# EAGLE board line_follower (EAGLE 9.6.2)
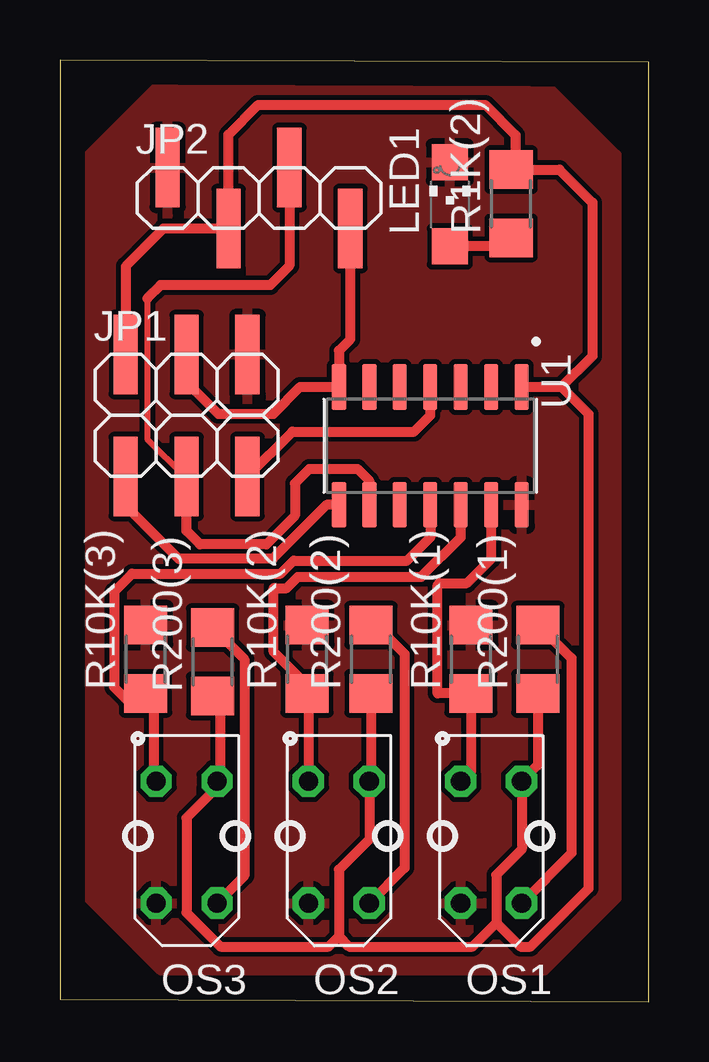
[diagram p0: board, top side]

Size 24.55 x 39.24 mm. Coordinates in mm from the lower left corner, seen from the top.
Outline: 0,0.1 24.55,0 24.55,39.14 0,39.24 0,0.1
Copper layers (1*16): Top 0.035mm / dielectric 1.5mm / Bottom 0.035mm
Design rules "default *": minimum track width 6mil, minimum drill 0.35mm, track to track 8mil, track to pad 8mil, pad to pad 8mil, via to via 8mil, smd to smd 8mil, copper to edge 40mil, drill to drill 6mil, minimum pad ring 10mil, minimum via ring 8mil, stop-mask expansion 4mil, vias tented up to drill 0mil, thermal gap 10mil

## Footprints (pad centres in the part's own frame; a part is rotated, then mirrored left to right if it is on the bottom)
2X03SMD = smd 1.016 x 3.302: 1 -1.27,-3.81; 2 -1.27,1.27; 3 1.27,-3.81; 4 1.27,1.27; 5 3.81,-3.81; 6 3.81,1.27
1X04SMD = smd 1.016 x 3.302: 1 -1.27,1.27; 2 1.27,-1.27; 3 3.81,1.27; 4 6.35,-1.27
CHIPLED_1206 = smd 1.5 x 1.5: A 0,-1.75; C 0,1.75
TCRT5000 = drill 0.8 octagon: A -2.54,-1.27; C 2.54,-1.27; E 2.54,1.27; K -2.54,1.27
R1206 = smd 1.6 x 1.803: 1 -1.422,0; 2 1.422,0
SOIC127P600X175-14N = smd 1.9 x 0.6: 1 -2.455,3.81; 2 -2.455,2.54; 3 -2.455,1.27; 4 -2.455,0; 5 -2.455,-1.27; 6 -2.455,-2.54; 7 -2.455,-3.81; 8 2.455,-3.81; 9 2.455,-2.54; 10 2.455,-1.27; 11 2.455,0; 12 2.455,1.27; 13 2.455,2.54; 14 2.455,3.81

## Placement (x,y rotation side)
JP1  [2X03SMD]  4.01,25.7 0 top
JP2  [1X04SMD]  5.76,33.49 0 top
LED1  [CHIPLED_1206]  16.26,33.22 0 top
OS1  [TCRT5000]  17.98,6.65 90 top
OS2  [TCRT5000]  11.63,6.65 90 top
OS3  [TCRT5000]  5.28,6.65 90 top
R1K(2)  [R1206]  18.81,33.25 90 top
R10K(1)  [R1206]  17.14,14.27 90 top
R10K(2)  [R1206]  10.31,14.27 90 top
R10K(3)  [R1206]  3.58,14.27 90 top
R200(1)  [R1206]  19.93,14.27 90 top
R200(2)  [R1206]  12.97,14.27 90 top
R200(3)  [R1206]  6.37,14.17 90 top
U1  ATTINY44A-SSU  [SOIC127P600X175-14N]  15.44,23.16 270 top

## Library data of the parts
JP1 JP2 = pinhead-2
LED1 = led
OS1-OS3 = tcrt5000
R1K(2) R10K(1) R10K(2) R10K(3) R200(1) R200(2) R200(3) = rcl; SPICEPREFIX: R
U1 = ATTINY44A-SSU; AVAILABILITY: Unavailable; DESCRIPTION: AVR AVR® ATtiny Microcontroller IC 8-Bit 20MHz 4KB _2K x 16_ FLASH 14-SOIC; MF: Microchip; MP: ATTINY44A-SSU; PACKAGE: SOIC-14 Microchip; PRICE: None

## Nets
GND: JP1.6 JP2.1 LED1.C OS1.K OS2.K OS3.K R10K(1).2 R10K(2).2 R10K(3).2 U1.14
N$1: OS1.E R10K(1).1 U1.13
N$3: LED1.A R1K(2).1
N$4: JP1.4 JP2.4 U1.7
N$5: OS2.E R10K(2).1 U1.12
N$6: JP1.1 U1.8
N$7: OS3.E R10K(3).1 U1.11
N$9: JP1.5 U1.4
N$10: OS1.A R200(1).2
N$11: JP1.3 JP2.3 U1.9
N$17: OS2.A R200(2).2
N$19: OS3.A R200(3).2
VCC: JP1.2 JP2.2 OS1.C OS2.C OS3.C R1K(2).2 R200(1).1 R200(2).1 R200(3).1 U1.1

## Tracks (layer width: path | path; a pad name or v marks a point on that pad's centre or on a via)
GND
  pour Top: 23.2,4.3 20.2,1.3 4.2,1.3 1.2,4.3 1.2,35.3 4.2,38.3 20.2,38.3 23.2,35.3
  pour Top: 1.2,35.3 4.2,38.3 20.2,38.3 23.2,35.3 23.2,4.3 20.2,1.3 4.2,1.3 1.2,4.3
N$1
  Top 0.406: OS1.E 17.14,9.62 R10K(1).1 15.74,12.85 15.74,17.36 15.82,17.45 16.96,17.45 17.98,18.46 U1.13
N$3
  Top 0.406: 16.29,31.5 LED1.A 18.45,31.47 R1K(2).1 18.81,31.57 18.74,31.5
N$4
  Top 0.406: JP1.4 5.28,25.82 6.6,24.5 8.9,24.5 10.01,25.62 U1.7 11.63,27.13 12.11,27.61 JP2.4
N$5
  Top 0.406: R10K(2).1 10.31,12.67 | OS2.E 10.36,12.62 10.31,12.67 | 10.31,12.67 10.11,12.87 10.11,13.38 8.91,14.58 8.91,17.23 9.46,17.23 9.92,17.7 15.06,17.7 16.71,19.35 U1.12
N$6
  Top 0.406: JP1.1 2.74,20.66 4.95,18.45 8.87,18.45 11.12,20.71 U1.8
N$7
  Top 0.406: R10K(3).1 3.58,12.62 | OS3.E 3.91,9.29 3.91,12.62 3.58,12.62 | U1.11 15.44,19.35 14.47,18.39 9.75,18.39 9.21,17.84 3.01,17.84 2.25,17.08 2.25,13.11 2.74,12.62 3.58,12.62
N$9
  Top 0.406: JP1.5 9.69,23.76 14.77,23.76 15.44,24.43 U1.4
N$10
  Top 0.406: R200(1).2 19.96,15.69 21.33,14.32 21.33,6.19 OS1.A
N$11
  Top 0.254: 3.64,29.31 3.64,23.44 5.19,21.89 JP1.3
  Top 0.406: JP1.3 5.28,19.62 5.84,19.06 8.61,19.06 9.8,20.25 9.8,21.6 10.4,22.2 12.4,22.2 12.9,21.7 U1.9 | JP2.3 9.57,30.67 8.76,29.86 4.19,29.86 3.64,29.31
N$17
  Top 0.406: R200(2).2 13.17,15.69 14.37,14.5 14.37,5.58 OS2.A
N$19
  Top 0.406: OS3.A 7.69,5.25 7.69,14.27 R200(3).2
VCC
  Top 0.406: R200(2).1 12.97,9.26 OS2.C 12.9,6.78 11.63,5.51 11.63,2.73 | R200(3).1 6.68,12.44 6.68,9.32 OS3.C 6.55,8.94 5.28,7.67 5.28,3.71 6.69,2.3 11.2,2.3 11.63,2.73 | R200(1).1 19.93,9.87 OS1.C 19.25,6.35 18.19,5.29 18.19,3.31 18.2,3.3 | 20.91,25.62 22.2,26.9 22.2,33.3 20.83,34.67 R1K(2).2 18.99,34.49 18.99,36.11 17.73,37.37 8.27,37.37 7.03,36.13 JP2.2 4.32,32.22 2.74,30.64 JP1.2 | 20.91,25.62 22.04,24.49 22.04,4.73 19.61,2.3 19.2,2.3 18.2,3.3 | U1.1 20.91,25.62 | 11.63,2.73 12.06,2.3 17.2,2.3 18.2,3.3